# Altium PCB AX301_AX4010.PcbDoc (part 5 of 10)
Units mm, origin at the board's own origin, x right, y up, seen from the top; angles counter-clockwise.
Board outline 131.7 x 91.8 mm, 4 copper layers (Top Layer, GND, Mid-Layer 1, Bottom Layer); 191 components, 338 nets, 1108 pads, 420 vias.
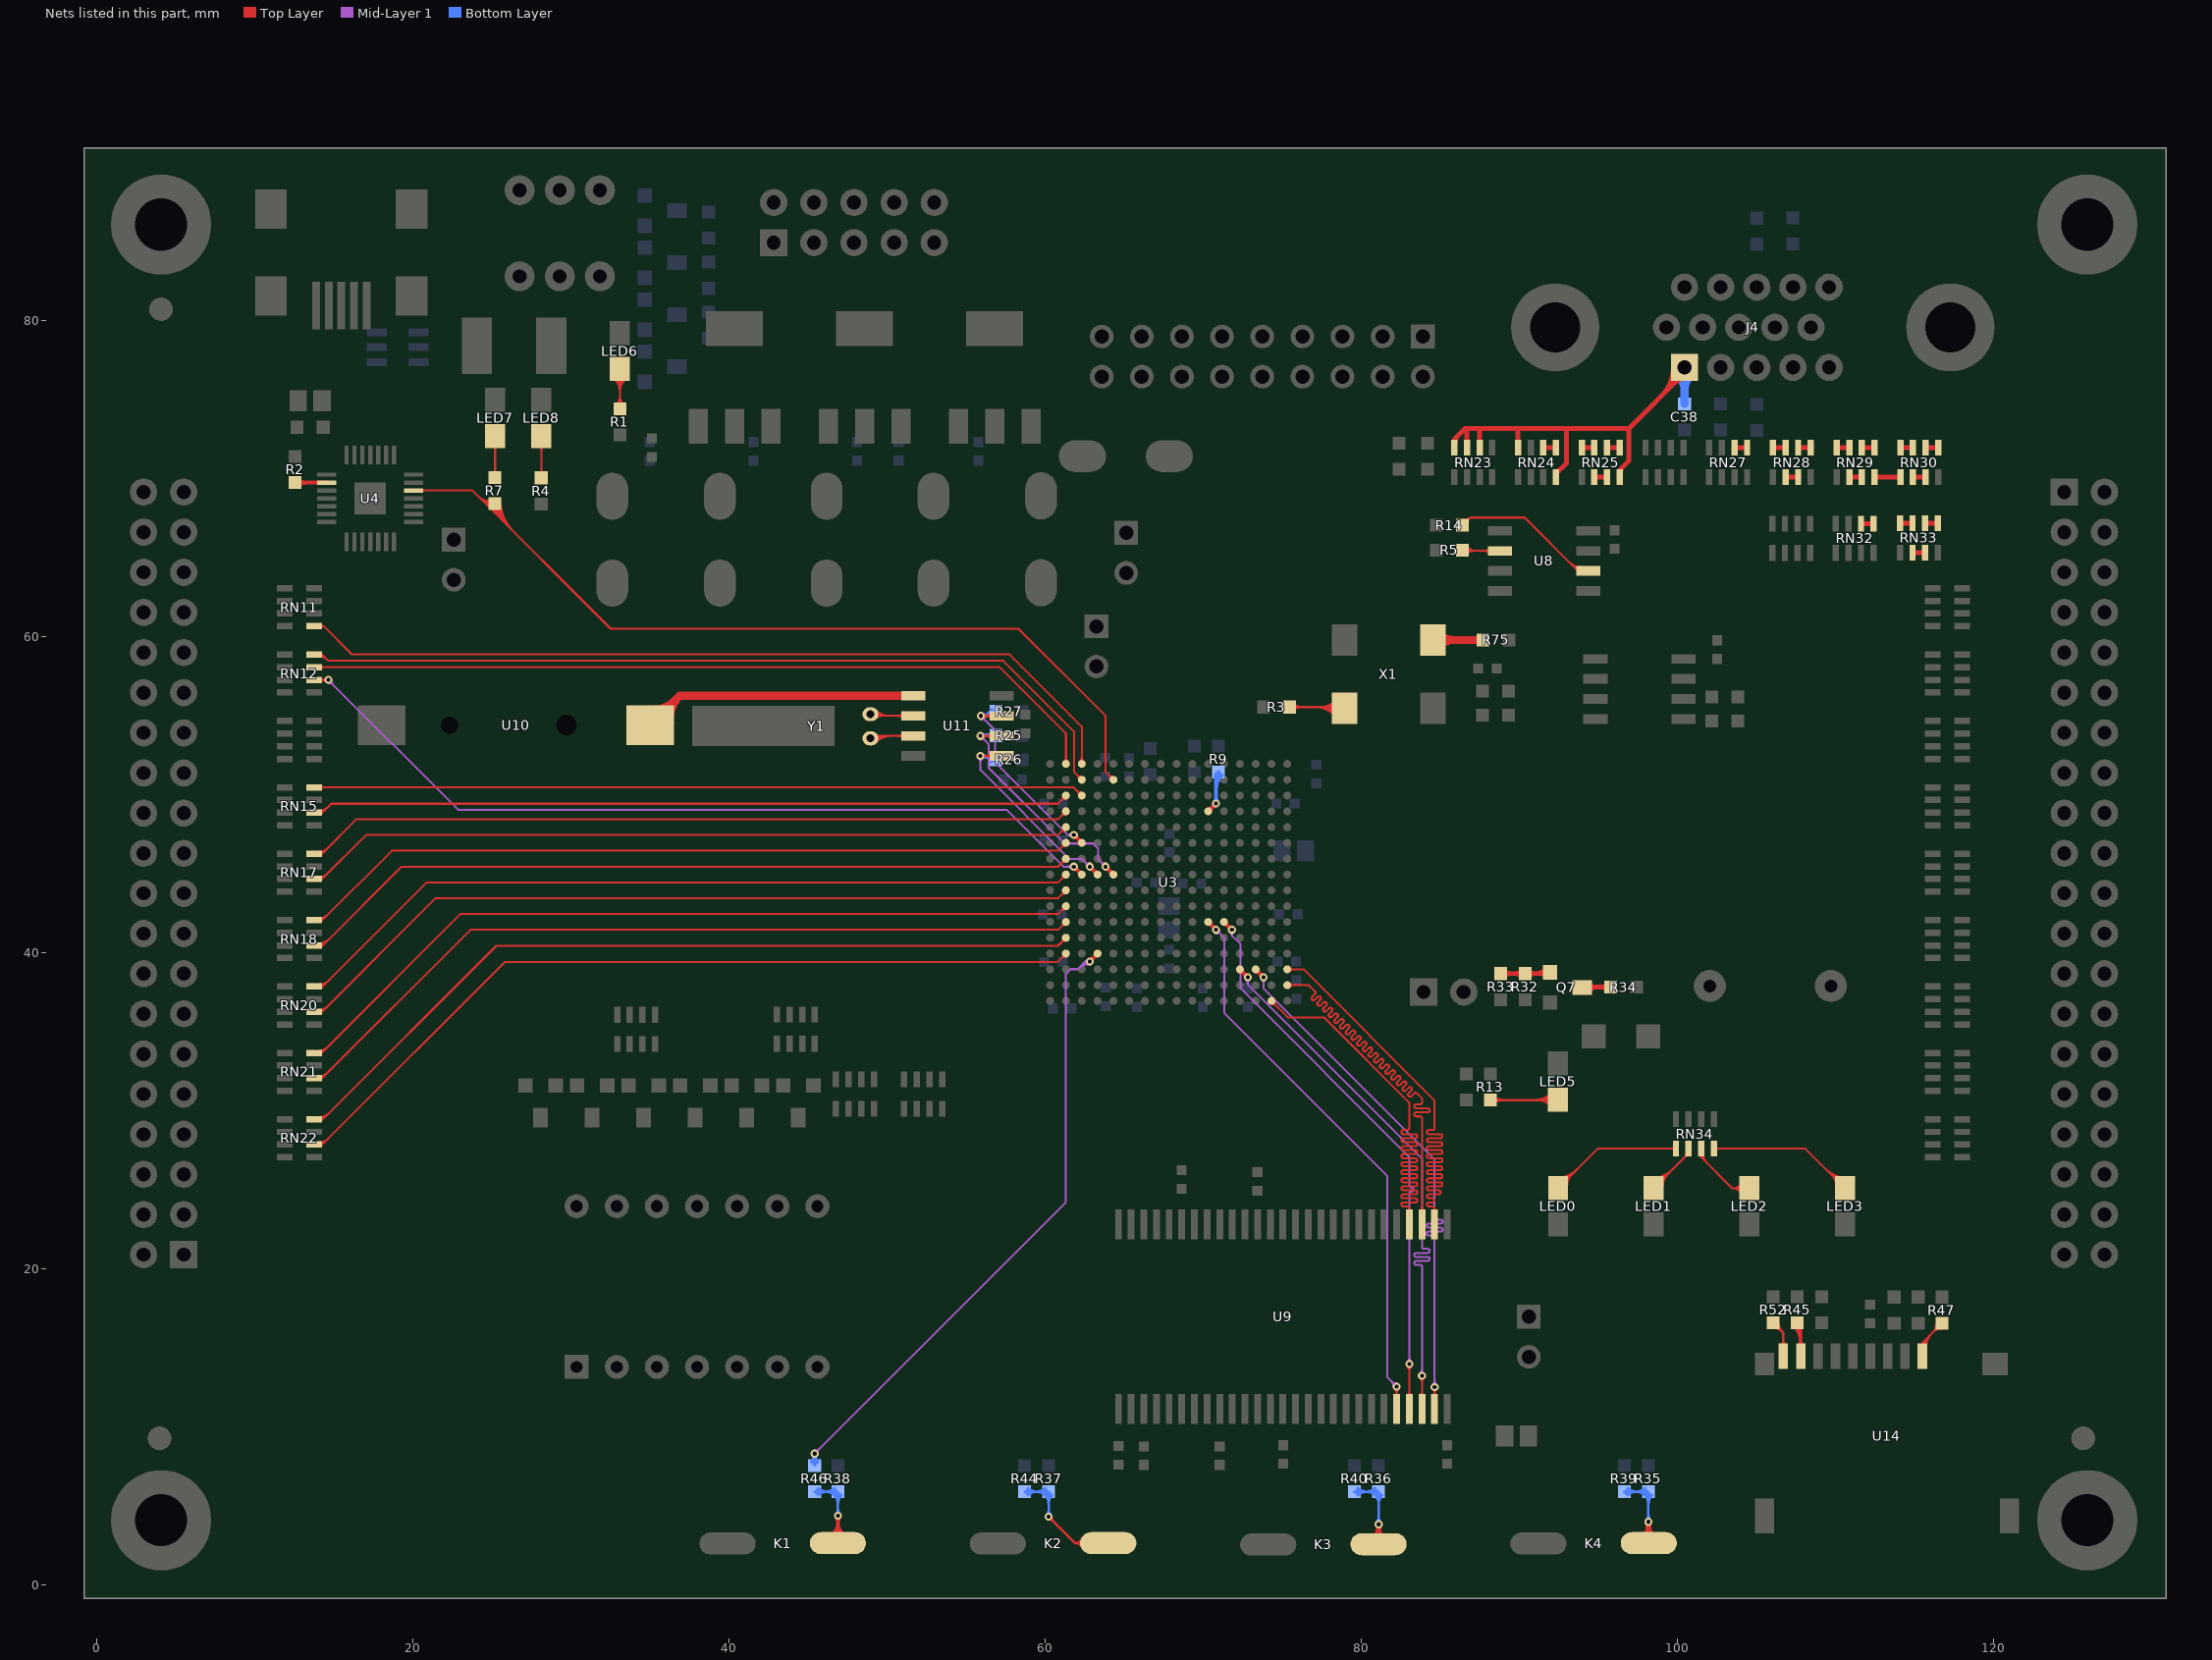
[diagram p7: the nets of this part, all layers, seen from the top]

## Via types
v1: diameter 0.508, hole 0.254, Top Layer to Bottom Layer, 377 vias
v2: diameter 0.762, hole 0.381, Top Layer to Bottom Layer, 41 vias
v3: diameter 1.016, hole 0.508, Top Layer to Bottom Layer, 2 vias

## Nets (pads, with @x,y where several pads share a name; then routed paths per layer and width w, separated by ;. In a path a pad name is that pad's centre, name@x,y a point inside that pad or via, vN(x,y) a via of type N, cw(c..) or ccw(c..) an arc to the next point about the centre after c; other vN are vias at no path point) (continued)
NetK1_1: K1.1 R38.2 R46.2 | length 18.6
  Top Layer w0.152: K1.1@46.447,3.057 ccw(c45.382,4.122) 46.888,4.122 ccw(c48.394,4.122) K1.1@47.329,3.057 ; K1.1@46.555,2.95 ccw(c45.75,3.754) 46.888,3.754 ccw(c48.026,3.754) K1.1@47.222,2.95 ; K1.1@46.663,2.842 ccw(c46.118,3.386) 46.888,3.386 ccw(c47.659,3.386) K1.1@47.114,2.842 ; v1@46.744,4.24 cw(c46.295,3.918) 46.84,3.828 ; v1@46.763,4.218 cw(c46.459,3.914) 46.888,3.914 cw(c47.318,3.914) v1@47.014,4.218 ; v1@46.785,4.199 cw(c46.606,3.95) 46.909,4 ; 46.868,4 cw(c47.171,3.95) v1@46.992,4.199 ; K1.1@46.888,2.616 v1(46.888,4.343) ; 46.937,3.828 cw(c47.482,3.918) v1@47.033,4.24
  Bottom Layer w0.152: R46.2@45.415,5.867 R38.2@46.888,5.867 v1(46.888,4.343) ; R46.2@45.541,5.742 cw(c45.844,5.438) 45.844,5.867 cw(c45.844,6.297) R46.2@45.541,5.993 ; R46.2@45.649,5.634 cw(c46.212,5.07) 46.212,5.867 cw(c46.212,6.665) R46.2@45.649,6.101 ; R38.2@46.655,6.101 cw(c46.091,6.665) 46.091,5.867 cw(c46.091,5.07) 46.655,5.634 cw(c46.091,5.07) 46.888,5.07 cw(c47.686,5.07) R38.2@47.122,5.634 ; v1@46.763,4.469 ccw(c46.459,4.773) 46.888,4.773 ccw(c47.318,4.773) v1@47.014,4.469 ; R38.2@46.763,5.993 cw(c46.459,6.297) 46.459,5.867 cw(c46.459,5.438) 46.763,5.742 cw(c46.459,5.438) 46.888,5.438 cw(c47.318,5.438) R38.2@47.014,5.742
NetK2_1: K2.1 R37.2 R44.2 | length 16.7
  Top Layer w0.152: v1@60.223,4.115 cw(c60.223,3.686) 60.527,3.989 cw(c60.83,4.293) v1@60.401,4.293 ; v1(60.223,4.293) 61.9,2.616 ; K2.1@62.356,2.335 ccw(c61.9,2.105) 61.9,2.616 ; K2.1@62.356,2.897 cw(c61.9,3.127) 61.9,2.616 ; K2.1@62.492,2.404 ccw(c62.147,2.23) 62.147,2.616 ccw(c62.147,3.002) K2.1@62.492,2.828 ; K2.1@63.991,2.616 61.9,2.616
  Bottom Layer w0.152: R44.2@58.699,5.867 R37.2@60.223,5.867 v1(60.223,4.293) ; R44.2@58.825,5.742 cw(c59.129,5.438) 59.129,5.867 cw(c59.129,6.297) R44.2@58.825,5.993 ; R44.2@58.933,5.634 cw(c59.497,5.07) 59.497,5.867 cw(c59.497,6.665) R44.2@58.933,6.101 ; R37.2@59.99,6.101 cw(c59.426,6.665) 59.426,5.867 cw(c59.426,5.07) 59.99,5.634 cw(c59.426,5.07) 60.223,5.07 cw(c61.021,5.07) R37.2@60.457,5.634 ; v1@60.098,4.418 ccw(c59.794,4.722) 60.223,4.722 ccw(c60.653,4.722) v1@60.349,4.418 ; R37.2@60.098,5.993 cw(c59.794,6.297) 59.794,5.867 cw(c59.794,5.438) 60.098,5.742 cw(c59.794,5.438) 60.223,5.438 cw(c60.653,5.438) R37.2@60.349,5.742
NetK3_2: K3.2 R36.2 R40.2 | length 16.5
  Top Layer w0.152: K3.2@80.719,3.044 ccw(c80.145,3.81) v1(81.102,3.81) ; K3.2@80.811,2.922 ccw(c80.374,3.505) 81.102,3.505 ; v1@80.948,3.721 cw(c80.576,3.506) 80.991,3.395 cw(c81.406,3.284) v1@81.191,3.656 ; v1@80.976,3.684 cw(c80.673,3.381) 81.102,3.381 cw(c81.531,3.381) v1@81.228,3.684 ; v1@81.013,3.656 cw(c80.799,3.284) 81.213,3.395 cw(c81.628,3.506) v1@81.256,3.721 ; K3.2@81.102,2.554 v1(81.102,3.81) ; 81.102,3.497 ccw(c81.84,3.497) K3.2@81.385,2.916 ; K3.2@81.479,3.036 cw(c82.086,3.81) v1(81.102,3.81)
  Bottom Layer w0.152: R40.2@79.561,5.85 R40.2@79.578,5.867 R36.2@81.102,5.867 v1(81.102,3.81) ; R40.2@79.704,5.742 cw(c80.007,5.438) 80.007,5.867 cw(c80.007,6.297) R40.2@79.704,5.993 ; R40.2@79.812,5.634 cw(c80.375,5.07) 80.375,5.867 cw(c80.375,6.665) R40.2@79.812,6.101 ; R36.2@80.869,6.101 cw(c80.305,6.665) 80.305,5.867 cw(c80.305,5.07) 80.869,5.634 cw(c80.305,5.07) 81.102,5.07 cw(c81.899,5.07) R36.2@81.336,5.634 ; v1@80.976,3.936 ccw(c80.673,4.239) 81.102,4.239 ccw(c81.531,4.239) v1@81.228,3.936 ; R36.2@80.976,5.993 cw(c80.673,6.297) 80.673,5.867 cw(c80.673,5.438) 80.976,5.742 cw(c80.673,5.438) 81.102,5.438 cw(c81.531,5.438) R36.2@81.228,5.742
NetK4_1: K4.1 R35.2 R39.2 | length 17.2
  Top Layer w0.152: K4.1@97.778,3.079 ccw(c96.982,3.962) v1(98.171,3.962) ; K4.1@97.881,2.966 ccw(c97.291,3.619) 98.171,3.619 ; v1@98.017,3.874 cw(c97.645,3.659) 98.06,3.548 ; v1@98.045,3.837 cw(c97.742,3.533) 98.171,3.533 cw(c98.6,3.533) v1@98.297,3.837 ; 98.06,3.548 cw(c98.474,3.437) v1@98.26,3.808 ; v1@98.082,3.808 cw(c97.868,3.437) 98.282,3.548 cw(c98.697,3.659) v1@98.325,3.874 ; K4.1@98.171,2.642 v1(98.171,3.962) ; 98.171,3.33 ccw(c98.765,3.33) K4.1@98.395,2.866 ; 98.171,3.646 ccw(c99.016,3.646) K4.1@98.49,2.985 ; K4.1@98.585,3.104 cw(c99.267,3.962) v1(98.171,3.962)
  Bottom Layer w0.152: R39.2@96.647,5.867 R35.2@98.171,5.867 v1(98.171,3.962) ; R39.2@96.773,5.742 cw(c97.076,5.438) 97.076,5.867 cw(c97.076,6.297) R39.2@96.773,5.993 ; R39.2@96.88,5.634 cw(c97.444,5.07) 97.444,5.867 cw(c97.444,6.665) R39.2@96.88,6.101 ; R35.2@97.938,6.101 cw(c97.374,6.665) 97.374,5.867 cw(c97.374,5.07) 97.938,5.634 cw(c97.374,5.07) 98.171,5.07 cw(c98.968,5.07) R35.2@98.404,5.634 ; v1@98.045,4.088 ccw(c97.742,4.392) 98.171,4.392 ccw(c98.6,4.392) v1@98.297,4.088 ; R35.2@98.045,5.993 cw(c97.742,6.297) 97.742,5.867 cw(c97.742,5.438) 98.045,5.742 cw(c97.742,5.438) 98.171,5.438 cw(c98.6,5.438) R35.2@98.297,5.742
NetLED0_1: LED0.1 RN34.5 | length 14.7
  Top Layer w0.127: LED0.1@92.456,25.07 94.967,27.581 RN34.5@99.911,27.581 RN34.5@99.911,27.191 ; LED0.1@92.456,25.387 ccw(c92.456,26.154) LED0.1@92.998,25.612 ; LED0.1@92.456,25.514 ccw(c92.456,26.587) 93.215,25.829 ; LED0.1@92.456,25.641 ccw(c92.456,27.021) 93.432,26.045 ; LED0.1@92.456,25.768 ccw(c92.456,27.455) 93.648,26.262 ; LED0.1@92.9,25.197 cw(c93.667,25.197) 93.125,25.739 ; LED0.1@93.027,25.197 cw(c94.101,25.197) 93.342,25.956 ; RN34.5@99.815,27.484 ccw(c99.582,27.251) 99.582,27.581 ccw(c99.582,27.91) RN34.5@99.815,27.677
NetLED1_1: LED1.1 RN34.6 | length 9.2
  Top Layer w0.127: LED1.1@98.51,25.07 100.711,27.271 RN34.6@100.711,27.581 ; LED1.1@98.51,25.387 ccw(c98.51,26.154) LED1.1@99.052,25.612 ; LED1.1@98.51,25.514 ccw(c98.51,26.587) 99.268,25.829 ; LED1.1@98.51,25.641 ccw(c98.51,27.021) 99.485,26.045 ; LED1.1@98.51,25.768 ccw(c98.51,27.455) 99.702,26.262 ; LED1.1@98.954,25.197 cw(c99.721,25.197) 99.179,25.739 ; LED1.1@99.081,25.197 cw(c100.154,25.197) 99.395,25.956 ; 100.472,27.032 ccw(c100.223,27.281) RN34.6@100.575,27.281 ; 100.494,27.054 cw(c100.711,26.837) RN34.6@100.711,27.144
NetLED2_1: LED2.1 RN34.7 | length 9
  Top Layer w0.127: RN34.7@101.394,27.281 ccw(c101.695,27.281) 101.482,27.067 ; RN34.7@101.44,27.164 cw(c101.364,27.038) 101.511,27.038 ; RN34.7@101.511,27.581 101.511,27.038 ; RN34.7@101.521,27.281 ccw(c102.129,27.281) 101.699,26.851 ; RN34.7@101.582,27.164 ccw(c101.658,27.038) 101.511,27.038 ; RN34.7@101.648,27.281 ccw(c102.562,27.281) 101.916,26.634 ; LED2.1@104.092,24.747 ccw(c103.48,24.328) 103.48,25.07 ; LED2.1@104.092,25.393 cw(c103.48,25.812) 103.48,25.07 ; LED2.1@104.197,24.819 ccw(c103.72,24.493) 103.72,25.07 ccw(c103.72,25.647) LED2.1@104.197,25.321 ; LED2.1@104.885,25.07 LED2.1@104.563,25.07 103.48,25.07 ; 101.511,27.038 103.48,25.07
NetLED3_1: LED3.1 RN34.8 | length 15.4
  Top Layer w0.127: RN34.8@102.311,27.33 RN34.8@102.311,27.581 108.106,27.581 LED3.1@110.617,25.07 ; RN34.8@102.408,27.484 cw(c102.641,27.251) 102.641,27.581 cw(c102.641,27.91) RN34.8@102.408,27.677 ; 109.425,26.262 ccw(c110.617,27.455) LED3.1@110.617,25.768 ; 109.641,26.045 ccw(c110.617,27.021) LED3.1@110.617,25.641 ; 109.731,25.956 cw(c108.972,25.197) LED3.1@110.045,25.197 ; 109.858,25.829 ccw(c110.617,26.587) LED3.1@110.617,25.514 ; 109.948,25.739 cw(c109.406,25.197) LED3.1@110.172,25.197 ; LED3.1@110.075,25.612 ccw(c110.617,26.154) LED3.1@110.617,25.387
NetLED5_2: LED5.2 R13.2 | length 10.4
  Top Layer w0.152: R13.2@88.163,30.658 LED5.2@92.405,30.658 ; R13.2@88.289,30.532 cw(c88.593,30.229) 88.593,30.658 cw(c88.593,31.087) R13.2@88.289,30.784 ; R13.2@88.397,30.424 cw(c88.961,29.861) 88.961,30.658 cw(c88.961,31.455) R13.2@88.397,30.891 ; 91.02,30.658 ccw(c91.02,32.094) LED5.2@92.035,31.078 ; 91.143,30.658 cw(c91.143,29.395) LED5.2@92.035,30.288 ; 91.388,30.658 ccw(c91.388,31.726) LED5.2@92.143,30.971 ; 91.511,30.658 cw(c91.511,29.763) LED5.2@92.143,30.396 ; 91.756,30.658 ccw(c91.756,31.358) LED5.2@92.251,30.863
NetLED6_1: LED6.1 R1.2 | length 9.7
  Top Layer w0.127: LED6.1@32.692,76.38 cw(c31.716,75.404) 33.096,75.404 cw(c34.476,75.404) LED6.1@33.5,76.38 ; LED6.1@32.782,76.47 cw(c32.023,75.711) 33.096,75.711 cw(c34.169,75.711) LED6.1@33.411,76.47 ; R1.2@32.854,74.639 ccw(c32.268,75.224) 33.096,75.224 ccw(c33.924,75.224) R1.2@33.339,74.639 ; LED6.1@32.872,76.56 cw(c32.33,76.018) 33.096,76.018 cw(c33.863,76.018) LED6.1@33.321,76.56 ; R1.2@32.944,74.549 ccw(c32.575,74.918) 33.096,74.918 ccw(c33.617,74.918) R1.2@33.249,74.549 ; R1.2@33.096,74.397 LED6.1@33.096,76.911
NetLED7_2: LED7.2 R7.2 | length 8.3
  Top Layer w0.127: LED7.2@24.793,72.722 cw(c23.817,71.747) 25.197,71.747 cw(c26.577,71.747) LED7.2@25.601,72.722 ; LED7.2@24.882,72.812 cw(c24.124,72.053) 25.197,72.053 cw(c26.27,72.053) LED7.2@25.511,72.812 ; LED7.2@24.972,72.902 cw(c24.43,72.36) 25.197,72.36 cw(c25.963,72.36) LED7.2@25.421,72.902 ; R7.2@25.197,70.053 LED7.2@25.197,73.254
NetLED8_2: LED8.2 R4.2 | length 8.2
  Top Layer w0.127: LED8.2@27.714,72.646 cw(c26.738,71.671) 28.118,71.671 cw(c29.498,71.671) LED8.2@28.522,72.646 ; LED8.2@27.803,72.736 cw(c27.045,71.977) 28.118,71.977 cw(c29.191,71.977) LED8.2@28.432,72.736 ; LED8.2@27.893,72.826 cw(c27.351,72.284) 28.118,72.284 cw(c28.884,72.284) LED8.2@28.342,72.826 ; R4.2@28.118,70.028 LED8.2@28.118,73.177
NetQ7_1: Q7.1 R32.2 R33.2 | length 7.1
  Top Layer w0.305: R33.2@88.824,38.659 R32.2@90.373,38.659 Q7.1@91.872,38.659 ; R33.2@89.003,38.479 cw(c89.437,38.046) 89.437,38.659 cw(c89.437,39.272) R33.2@89.003,38.838 ; R32.2@90.194,38.479 ccw(c89.76,38.046) 89.76,38.659 ccw(c89.76,39.272) R32.2@90.194,38.838 ; R32.2@90.553,38.479 cw(c90.986,38.046) 90.986,38.659 cw(c90.986,39.272) R32.2@90.553,38.838 ; 91.028,38.659 ccw(c91.028,39.655) Q7.1@91.732,38.951 ; 91.396,38.659 cw(c91.396,38.183) Q7.1@91.732,38.519
NetQ7_3: Q7.3 R34.1 | length 3.9
  Top Layer w0.305: Q7.3@94.005,37.795 R34.1@95.783,37.795 ; Q7.3@94.373,37.554 cw(c94.955,36.973) 94.955,37.795 ; Q7.3@94.373,37.985 ccw(c94.832,38.444) 94.832,37.795 ; R34.1@95.604,37.616 ccw(c95.17,37.182) 95.17,37.795 ccw(c95.17,38.408) R34.1@95.604,37.975
NetR2_1: R2.1 U4.9 | length 3.1
  Top Layer w0.254: R2.1@12.55,69.726 U4.9@14.546,69.726 ; R2.1@12.745,69.525 cw(c13.228,69.042) 13.228,69.726 ; R2.1@12.745,69.921 ccw(c13.216,70.391) 13.216,69.726
NetR3_2: R3.2 X1.3 | length 13.3
  Top Layer w0.127: R3.2@75.463,55.524 X1.3@78.74,55.524 ; R3.2@75.616,55.372 cw(c75.985,55.003) 75.985,55.524 cw(c75.985,56.046) R3.2@75.616,55.677 ; R3.2@75.706,55.282 cw(c76.291,54.697) 76.291,55.524 cw(c76.291,56.352) R3.2@75.706,55.767 ; 76.981,55.524 cw(c76.981,53.486) X1.3@78.422,54.927 ; 77.288,55.524 cw(c77.288,53.793) X1.3@78.512,55.017 ; 77.349,55.524 ccw(c77.349,57.042) X1.3@78.422,55.969 ; 77.594,55.524 cw(c77.594,54.099) X1.3@78.602,55.107 ; 77.656,55.524 ccw(c77.656,56.736) X1.3@78.512,55.879 ; 77.901,55.524 cw(c77.901,54.406) X1.3@78.692,55.197 ; 77.962,55.524 ccw(c77.962,56.429) X1.3@78.602,55.789 ; X1.3@78.816,55.448 X1.3@78.943,55.448
NetR5_2: R5.2 U8.2 | length 5.1
  Top Layer w0.127: R5.2@86.462,65.405 U8.2@88.773,65.405 ; R5.2@86.563,65.608 ccw(c87.055,66.1) 87.055,65.405 ; R5.2@86.653,65.213 cw(c87.116,64.751) 87.116,65.405 ; R5.2@86.653,65.698 ccw(c87.361,66.406) 87.361,65.405 ; U8.2@88.145,65.234 ccw(c87.733,64.822) 87.733,65.405 ccw(c87.733,65.988) U8.2@88.145,65.576
NetR14_2: R14.2 U8.6 | length 12.6
  Top Layer w0.127: R14.2@86.411,67.031 86.893,67.513 ; R14.2@86.442,67.244 ccw(c86.489,67.56) 86.715,67.334 ccw(c86.941,67.108) R14.2@86.624,67.062 ; R14.2@86.461,67.37 ccw(c86.534,67.872) 86.893,67.513 ; R14.2@86.75,67.08 cw(c87.252,67.154) 86.893,67.513 ; 93.188,64.673 ccw(c93.904,65.388) U8.6@93.904,64.376 ; 93.405,64.456 ccw(c93.904,64.954) U8.6@93.904,64.249 ; U8.6@93.618,64.243 cw(c93.509,64.135) U8.6@93.662,64.135 ; U8.6@94.361,64.135 93.726,64.135 90.348,67.513 86.893,67.513
NetR45_2: R45.2 U14.8 | length 6.6
  Top Layer w0.152: R45.2@107.361,16.327 cw(c106.28,15.247) U14.8@107.809,15.247 ; R45.2@107.469,16.435 cw(c106.648,15.614) 107.809,15.614 ; R45.2@107.576,16.543 cw(c107.016,15.982) 107.809,15.982 ; R45.2@107.594,16.561 107.809,16.347 U14.8@107.809,14.448 ; U14.8@107.634,15.089 ccw(c107.166,15.467) 107.761,15.557 ; U14.8@107.65,15.106 ccw(c107.268,15.488) 107.809,15.488 ccw(c108.349,15.488) U14.8@107.967,15.106 ; 107.788,15.382 ccw(c108.171,15.44) U14.8@107.941,15.128
NetR47_2: R47.2 U14.1 | length 8.1
  Top Layer w0.127: U14.1@115.364,14.948 cw(c115.879,14.948) 115.515,15.312 ; U14.1@115.416,15.166 ccw(c115.357,15.306) 115.509,15.306 ; U14.1@115.491,14.948 cw(c116.312,14.948) 115.732,15.529 ; U14.1@115.509,14.448 115.509,15.306 ; U14.1@115.601,15.166 cw(c115.661,15.306) 115.509,15.306 ; U14.1@115.618,14.948 cw(c116.746,14.948) 115.948,15.745 ; U14.1@115.745,14.948 cw(c117.179,14.948) 116.165,15.962 ; R47.2@116.395,16.535 cw(c115.568,16.535) 116.153,15.95 cw(c116.738,15.365) R47.2@116.738,16.192 ; R47.2@116.522,16.535 cw(c116.001,16.535) 116.37,16.167 cw(c116.738,15.798) R47.2@116.738,16.319 ; R47.2@116.738,16.535 115.509,15.306
NetR52_2: R52.2 U14.9 | length 5.2
  Top Layer w0.152: R52.2@106.07,16.231 cw(c106.07,15.433) 106.634,15.997 cw(c107.198,16.561) R52.2@106.401,16.561 ; R52.2@106.07,16.383 cw(c106.07,15.954) 106.374,16.257 cw(c106.677,16.561) R52.2@106.248,16.561 ; R52.2@106.07,16.561 106.709,15.923 U14.9@106.709,14.448 ; U14.9@106.55,15.106 ccw(c106.168,15.488) 106.709,15.488 ccw(c107.249,15.488) U14.9@106.867,15.106
NetR75_1: R75.1 X1.1 | length 4.9
  Top Layer w0.508: X1.1@84.531,59.766 R75.1@87.325,59.766 ; X1.1@84.917,59.38 cw(c85.849,58.448) 85.849,59.766 cw(c85.849,61.084) X1.1@84.917,60.152
NetRN24_1: RN24.1 RN24.2 | length 0.8
  Top Layer w0.305: RN24.2@91.522,71.933 RN24.1@92.322,71.933
NetRN25_1: RN25.1 RN25.2 | length 0.8
  Top Layer w0.305: RN25.2@95.553,71.933 RN25.1@96.353,71.933
NetRN25_3: RN25.3 RN25.4 | length 0.8
  Top Layer w0.305: RN25.4@93.953,71.933 RN25.3@94.753,71.933
NetRN25_6: RN25.6 RN25.7 | length 0.8
  Top Layer w0.305: RN25.6@94.753,70.075 RN25.7@95.553,70.075
NetRN27_1: RN27.1 RN27.2 | length 0.8
  Top Layer w0.305: RN27.2@103.616,71.933 RN27.1@104.416,71.933
NetRN28_1: RN28.1 RN28.2 | length 0.8
  Top Layer w0.305: RN28.2@107.683,71.933 RN28.1@108.483,71.933
NetRN28_3: RN28.3 RN28.4 | length 0.8
  Top Layer w0.305: RN28.4@106.083,71.933 RN28.3@106.883,71.933
NetRN28_6: RN28.6 RN28.7 | length 0.8
  Top Layer w0.305: RN28.6@106.883,70.075 RN28.7@107.683,70.075
NetRN29_1: RN29.1 RN29.2 | length 0.8
  Top Layer w0.305: RN29.2@111.671,71.933 RN29.1@112.471,71.933
NetRN29_3: RN29.3 RN29.4 | length 0.8
  Top Layer w0.305: RN29.4@110.071,71.933 RN29.3@110.871,71.933
NetRN29_6: RN29.6 RN29.7 | length 0.8
  Top Layer w0.305: RN29.6@110.871,70.075 RN29.7@111.671,70.075
NetRN29_8: RN29.8 RN30.5 | length 1.6
  Top Layer w0.305: RN29.8@112.471,70.075 RN30.5@114.11,70.075
NetRN30_1: RN30.1 RN30.2 | length 0.8
  Top Layer w0.305: RN30.2@115.71,71.933 RN30.1@116.51,71.933
NetRN30_3: RN30.3 RN30.4 | length 0.8
  Top Layer w0.305: RN30.4@114.11,71.933 RN30.3@114.91,71.933
NetRN30_6: RN30.6 RN30.7 | length 0.8
  Top Layer w0.305: RN30.6@114.91,70.075 RN30.7@115.71,70.075
NetRN32_1: RN32.1 RN32.2 | length 0.8
  Top Layer w0.305: RN32.2@111.62,67.132 RN32.1@112.42,67.132
NetRN33_1: RN33.1 RN33.2 | length 0.8
  Top Layer w0.305: RN33.2@115.684,67.158 RN33.1@116.484,67.158
NetRN33_3: RN33.3 RN33.4 | length 0.8
  Top Layer w0.305: RN33.4@114.084,67.158 RN33.3@114.884,67.158
NetRN33_6: RN33.6 RN33.7 | length 0.8
  Top Layer w0.305: RN33.6@114.884,65.3 RN33.7@115.684,65.3
NetU10_1: U10.1 U11.1 | length 21.9
  Top Layer w0.508: U10.1@35.017,54.381 36.871,56.236 ; U10.1@35.267,55.377 ccw(c35.267,57.178) 36.541,55.905 ; U10.1@35.752,54.434 cw(c37.034,54.575) U10.1@36.122,55.487 ; U10.1@36.257,54.49 cw(c38.384,54.722) 36.871,56.236 ; U11.1@51.664,56.236 36.871,56.236
NetU11_2: U11.2 Y1.1 | length 6.2
  Top Layer w0.127: Y1.1@49.047,54.966 U11.2@51.664,54.966 ; Y1.1@49.099,55.157 ccw(c49.561,55.619) 49.561,54.966 ; Y1.1@49.189,55.247 ccw(c49.868,55.926) 49.868,54.966 ; Y1.1@49.279,54.798 cw(c49.684,54.393) 49.684,54.966 ; Y1.1@49.279,55.337 ccw(c50.174,56.232) 50.174,54.966 ; U11.2@51.036,54.795 ccw(c50.624,54.383) 50.624,54.966 ccw(c50.624,55.548) U11.2@51.036,55.136
NetU11_3: U11.3 Y1.2 | length 6.5
  Top Layer w0.127: Y1.2@49.098,53.696 U11.3@51.664,53.696 ; Y1.2@49.099,53.453 cw(c49.684,52.869) 49.684,53.696 ; Y1.2@49.189,53.364 cw(c49.99,52.562) 49.99,53.696 ; Y1.2@49.279,53.274 cw(c50.297,52.255) 50.297,53.696 ; Y1.2@49.279,53.813 ccw(c49.561,54.095) 49.561,53.696 ; U11.3@51.036,53.525 ccw(c50.624,53.113) 50.624,53.696 ccw(c50.624,54.278) U11.3@51.036,53.866
NSTATUS: R9.2 U3.F4 | length 5.6
  Top Layer w0.254: U3.F4@70.318,48.925 v1(70.818,49.425) ; U3.F4@70.318,49.048 ccw(c70.318,49.345) 70.528,49.135 ccw(c70.738,48.925) U3.F4@70.441,48.925 ; v1@70.691,49.425 cw(c70.384,49.425) 70.601,49.208 cw(c70.818,48.991) v1@70.818,49.298
  Bottom Layer w0.254: v1@70.728,49.514 ccw(c70.511,49.731) 70.818,49.731 ccw(c71.125,49.731) v1@70.908,49.514 ; v1(70.818,49.425) 70.818,51.26 R9.2@70.968,51.41 ; 70.818,50.374 cw(c72.003,50.374) R9.2@71.165,51.212 ; 70.818,50.987 cw(c71.39,50.987) R9.2@70.986,51.392
P1: RN11.5 U3.P1 | length 54.7
  Top Layer w0.127: RN11.5@13.745,60.643 14.351,60.643 ; RN11.5@14.147,60.552 cw(c14.351,60.369) 14.351,60.643 ; RN11.5@14.147,60.734 ccw(c14.351,60.917) 14.351,60.643 ; U3.P1@62.186,52.056 ccw(c61.868,52.375) 62.318,52.375 ccw(c62.768,52.375) U3.P1@62.45,52.056 ; U3.P1@62.318,51.925 62.318,54.293 57.76,58.852 16.142,58.852 14.351,60.643
P2: RN12.8 U3.P2 | length 55.3
  Top Layer w0.127: RN12.8@13.745,58.842 14.249,58.842 ; RN12.8@14.045,58.706 cw(c14.045,57.883) 14.627,58.465 ; RN12.8@14.045,58.833 cw(c14.045,58.317) 14.41,58.682 ; RN12.8@14.171,58.79 cw(c14.249,58.758) 14.249,58.842 ; RN12.8@14.171,58.894 ccw(c14.249,58.927) 14.249,58.842 ; U3.P2@62.132,50.925 ccw(c61.681,50.925) 62,51.243 ccw(c62.318,51.561) U3.P2@62.318,51.111 ; U3.P2@62.318,50.925 61.824,51.419 61.824,53.975 57.353,58.445 14.646,58.445 14.249,58.842
P3: RN15.8 U3.P3 | length 50
  Top Layer w0.127: RN15.8@13.745,50.441 61.801,50.441 U3.P3@62.318,49.925 ; RN15.8@14.142,50.345 cw(c14.375,50.112) 14.375,50.441 cw(c14.375,50.771) RN15.8@14.142,50.538 ; U3.P3@62.132,49.925 ccw(c61.681,49.925) 62,50.243 ccw(c62.318,50.561) U3.P3@62.318,50.111
P8: RN12.6 U3.P8 | length 57.3
  Top Layer w0.127: RN12.6@13.745,57.242 v1(14.646,57.242) ; RN12.6@14.142,57.146 cw(c14.375,56.913) 14.375,57.242 cw(c14.375,57.572) RN12.6@14.142,57.339 ; v1@14.512,57.108 ccw(c14.187,56.782) 14.187,57.242 ccw(c14.187,57.702) v1@14.512,57.377
  Top Layer w0.254: v1@61.818,45.298 cw(c61.818,44.991) 62.035,45.208 cw(c62.252,45.425) v1@61.945,45.425 ; v1(61.818,45.425) U3.P8@62.318,44.925 ; U3.P8@62.195,44.925 ccw(c61.898,44.925) 62.108,45.135 ccw(c62.318,45.345) U3.P8@62.318,45.048
  Mid-Layer 1 w0.127: v1@14.646,57.052 cw(c14.646,56.592) 14.972,56.917 cw(c15.297,57.242) v1@14.837,57.242 ; v1(14.646,57.242) 22.867,49.022 57.556,49.022 61.154,45.425 v1(61.818,45.425) ; v1@61.683,45.29 ccw(c61.358,44.965) 61.358,45.425 ccw(c61.358,45.885) v1@61.683,45.559
R1: RN12.7 U3.R1 | length 52.5
  Top Layer w0.127: RN12.7@13.745,58.042 57.121,58.042 61.318,53.846 U3.R1@61.318,51.925 ; RN12.7@14.142,57.946 cw(c14.375,57.713) 14.375,58.042 cw(c14.375,58.372) RN12.7@14.142,58.139 ; U3.R1@61.186,52.056 ccw(c60.868,52.375) 61.318,52.375 ccw(c61.768,52.375) U3.R1@61.45,52.056
R3: RN15.6 U3.R3 | length 50.1
  Top Layer w0.127: RN15.6@13.745,48.841 14.275,48.841 ; RN15.6@14.045,48.851 ccw(c14.045,49.428) 14.453,49.02 ; RN15.6@14.045,48.978 ccw(c14.045,49.862) 14.67,49.237 ; RN15.6@14.165,48.776 cw(c14.275,48.716) 14.275,48.841 ; RN15.6@14.165,48.906 ccw(c14.275,48.966) 14.275,48.841 ; U3.R3@61.132,49.925 cw(c60.681,49.925) 61,49.606 cw(c61.318,49.288) U3.R3@61.318,49.738 ; U3.R3@61.318,49.925 60.796,49.403 14.837,49.403 14.275,48.841
R4: RN17.8 U3.R4 | length 50.6
  Top Layer w0.127: RN17.8@13.745,46.241 14.249,46.241 ; RN17.8@14.045,46.25 ccw(c14.045,46.766) 14.41,46.401 ; RN17.8@14.045,46.377 ccw(c14.045,47.2) 14.627,46.618 ; RN17.8@14.171,46.189 cw(c14.249,46.156) 14.249,46.241 ; RN17.8@14.171,46.293 ccw(c14.249,46.325) 14.249,46.241 ; U3.R4@61.132,48.925 cw(c60.681,48.925) 61,48.606 cw(c61.318,48.288) U3.R4@61.318,48.738 ; U3.R4@61.318,48.925 60.831,48.438 16.447,48.438 14.249,46.241
R5: RN17.6 U3.R5 | length 50.9
  Top Layer w0.127: RN17.6@13.745,44.641 14.249,44.641 ; RN17.6@14.045,44.65 ccw(c14.045,45.166) 14.41,44.801 ; RN17.6@14.045,44.777 ccw(c14.045,45.6) 14.627,45.018 ; RN17.6@14.171,44.589 cw(c14.249,44.556) 14.249,44.641 ; RN17.6@14.171,44.693 ccw(c14.249,44.725) 14.249,44.641 ; U3.R5@61.132,47.925 cw(c60.681,47.925) 61,47.606 cw(c61.318,47.288) U3.R5@61.318,47.738 ; U3.R5@61.318,47.925 60.815,47.422 17.03,47.422 14.249,44.641
R6: RN18.8 U3.R6 | length 51.7
  Top Layer w0.127: RN18.8@13.745,42.04 14.275,42.04 ; RN18.8@14.045,42.05 ccw(c14.045,42.627) 14.453,42.219 ; RN18.8@14.045,42.177 ccw(c14.045,43.06) 14.67,42.436 ; RN18.8@14.165,41.975 cw(c14.275,41.915) 14.275,42.04 ; RN18.8@14.165,42.105 ccw(c14.275,42.165) 14.275,42.04 ; U3.R6@61.132,46.925 cw(c60.681,46.925) 61,46.606 cw(c61.318,46.288) U3.R6@61.318,46.738 ; U3.R6@61.318,46.925 60.825,46.431 18.666,46.431 14.275,42.04
R7: RN18.6 U3.R7 | length 52.4
  Top Layer w0.127: RN18.6@13.745,40.44 14.3,40.44 ; RN18.6@14.045,40.323 ccw(c14.045,40.655) 14.28,40.42 ; RN18.6@14.045,40.45 ccw(c14.045,41.088) 14.497,40.637 ; RN18.6@14.045,40.577 ccw(c14.045,41.522) 14.714,40.854 ; RN18.6@14.159,40.364 cw(c14.3,40.27) 14.3,40.44 ; RN18.6@14.159,40.516 ccw(c14.3,40.61) 14.3,40.44 ; U3.R7@61.132,45.925 cw(c60.681,45.925) 61,45.606 cw(c61.318,45.288) U3.R7@61.318,45.738 ; U3.R7@61.318,45.925 60.809,45.415 19.275,45.415 14.3,40.44
R8: RN20.8 U3.R8 | length 53.1
  Top Layer w0.127: RN20.8@13.745,37.84 14.3,37.84 ; RN20.8@14.045,37.722 ccw(c14.045,38.054) 14.28,37.819 ; RN20.8@14.045,37.849 ccw(c14.045,38.488) 14.497,38.036 ; RN20.8@14.045,37.976 ccw(c14.045,38.921) 14.714,38.253 ; RN20.8@14.159,37.764 cw(c14.3,37.67) 14.3,37.84 ; RN20.8@14.159,37.915 ccw(c14.3,38.01) 14.3,37.84 ; U3.R8@61.132,44.925 cw(c60.681,44.925) 61,44.606 cw(c61.318,44.288) U3.R8@61.318,44.738 ; U3.R8@61.318,44.925 60.818,44.425 20.885,44.425 14.3,37.84
R9: RN20.6 U3.R9 | length 52.7
  Top Layer w0.127: RN20.6@13.745,36.24 14.249,36.24 ; RN20.6@14.045,36.249 ccw(c14.045,36.765) 14.41,36.4 ; RN20.6@14.045,36.376 ccw(c14.045,37.199) 14.627,36.617 ; RN20.6@14.171,36.187 cw(c14.249,36.155) 14.249,36.24 ; RN20.6@14.171,36.292 ccw(c14.249,36.324) 14.249,36.24 ; U3.R9@61.132,43.925 cw(c60.681,43.925) 61,43.606 cw(c61.318,43.288) U3.R9@61.318,43.738 ; U3.R9@61.318,43.925 60.827,43.434 21.444,43.434 14.249,36.24
R10: RN21.8 U3.R10 | length 53.1
  Top Layer w0.127: RN21.8@13.745,33.639 14.224,33.639 23.003,42.418 60.811,42.418 U3.R10@61.318,42.925 ; RN21.8@14.045,33.649 ccw(c14.045,34.103) 14.367,33.782 ; RN21.8@14.045,33.776 ccw(c14.045,34.537) 14.583,33.999 ; U3.R10@61.132,42.925 cw(c60.681,42.925) 61,42.606 cw(c61.318,42.288) U3.R10@61.318,42.738
R11: RN21.6 U3.R11 | length 53.6
  Top Layer w0.127: RN21.6@13.745,32.039 14.249,32.039 ; RN21.6@14.045,32.049 ccw(c14.045,32.565) 14.41,32.2 ; RN21.6@14.045,32.176 ccw(c14.045,32.998) 14.627,32.417 ; RN21.6@14.171,31.987 cw(c14.249,31.955) 14.249,32.039 ; RN21.6@14.171,32.091 ccw(c14.249,32.124) 14.249,32.039 ; U3.R11@61.132,41.925 cw(c60.681,41.925) 61,41.606 cw(c61.318,41.288) U3.R11@61.318,41.738 ; U3.R11@61.318,41.925 60.821,41.427 23.638,41.427 14.249,32.039
R12: RN22.8 U3.R12 | length 54.9
  Top Layer w0.127: RN22.8@13.745,29.439 14.3,29.439 ; RN22.8@14.045,29.321 ccw(c14.045,29.653) 14.28,29.418 ; RN22.8@14.045,29.448 ccw(c14.045,30.087) 14.497,29.635 ; RN22.8@14.045,29.575 ccw(c14.045,30.52) 14.714,29.852 ; RN22.8@14.159,29.363 cw(c14.3,29.269) 14.3,29.439 ; RN22.8@14.159,29.514 ccw(c14.3,29.609) 14.3,29.439 ; U3.R12@61.132,40.925 cw(c60.681,40.925) 61,40.606 cw(c61.318,40.288) U3.R12@61.318,40.738 ; U3.R12@61.318,40.925 60.805,40.411 25.273,40.411 14.3,29.439
R13: RN22.6 U3.R13 | length 54.7
  Top Layer w0.127: RN22.6@13.745,27.839 14.275,27.839 ; RN22.6@14.045,27.848 ccw(c14.045,28.425) 14.453,28.017 ; RN22.6@14.045,27.975 ccw(c14.045,28.859) 14.67,28.234 ; RN22.6@14.165,27.773 cw(c14.275,27.714) 14.275,27.839 ; RN22.6@14.165,27.904 ccw(c14.275,27.963) 14.275,27.839 ; U3.R13@61.132,39.925 cw(c60.681,39.925) 61,39.606 cw(c61.318,39.288) U3.R13@61.318,39.738 ; U3.R13@61.318,39.925 60.789,39.395 25.832,39.395 14.275,27.839
RED: C38.1 J4.1 RN23.2 RN23.3 RN23.4 RN24.4 RN24.8 RN25.8 | length 38.2
  Top Layer w0.305: RN23.4@85.89,71.933 85.89,72.479 86.563,73.152 92.989,73.152 ; RN23.4@85.938,72.233 cw(c86.648,72.233) 86.146,72.735 ; RN23.3@86.69,71.933 86.69,73.101 ; RN23.2@87.49,71.933 87.49,73.139 ; RN24.4@89.922,71.933 89.922,73.132 ; RN24.8@92.322,70.075 92.322,70.3 92.989,70.968 92.989,73.152 ; RN24.8@92.322,70.422 ccw(c92.322,70.718) 92.531,70.509 ; RN25.8@96.353,70.075 96.353,70.521 96.939,71.107 96.939,73.152 ; RN25.8@96.401,70.375 cw(c96.869,70.375) 96.538,70.706 ; 99,75.213 ccw(c97.201,77.013) J4.1@99.746,77.013 ; 99.521,75.734 ccw(c98.242,77.013) J4.1@100.051,77.013 ; 99.828,76.041 cw(c100.457,75.412) J4.1@100.457,76.302 ; J4.1@100.041,76.254 ccw(c99.282,77.013) J4.1@100.355,77.013 ; J4.1@100.457,77.013 100.457,76.67 96.939,73.152 ; 92.989,73.152 94.983,73.152 96.939,73.152
  Bottom Layer w0.508: J4.1@100.026,76.582 cw(c98.985,75.541) 100.457,75.541 cw(c101.929,75.541) J4.1@100.888,76.582 ; C38.1@100.457,74.701 J4.1@100.457,77.013
RESET: R46.1 U3.N13 | length 47.6
  Top Layer w0.254: v1(62.818,39.425) U3.N13@63.318,39.925 ; v1@62.818,39.552 ccw(c62.818,39.858) 63.035,39.641 ccw(c63.252,39.425) v1@62.945,39.425 ; U3.N13@63.195,39.925 cw(c62.898,39.925) 63.108,39.715 cw(c63.318,39.505) U3.N13@63.318,39.802
  Mid-Layer 1 w0.127: v1(45.415,8.28) 61.29,24.155 61.29,38.608 61.62,38.938 62.052,38.938 ; v1@45.415,8.471 ccw(c45.415,8.931) 45.74,8.606 ccw(c46.066,8.28) v1@45.606,8.28 ; 62.257,39.143 cw(c62.785,38.615) v1@62.815,39.361 ; 62.462,39.348 cw(c62.801,39.009) v1@62.821,39.488 ; v1@62.641,39.355 ccw(c62.539,39.315) 62.539,39.425 ; v1@62.641,39.494 cw(c62.539,39.534) 62.539,39.425 ; v1@62.81,39.234 ccw(c62.769,38.222) 62.052,38.938 ; v1(62.818,39.425) 62.539,39.425 ; 62.052,38.938 62.539,39.425
  Bottom Layer w0.152: R46.1@45.189,7.759 ccw(c44.701,8.28) v1(45.415,8.28) ; v1@45.272,8.175 cw(c45.034,8) 45.32,7.923 cw(c45.605,7.847) v1@45.486,8.118 ; v1@45.289,8.155 cw(c44.986,7.851) 45.415,7.851 cw(c45.844,7.851) v1@45.541,8.155 ; R46.1@45.294,7.648 ccw(c45.031,7.929) 45.415,7.929 ccw(c45.8,7.929) R46.1@45.537,7.648 ; v1@45.344,8.118 cw(c45.226,7.847) 45.511,7.923 cw(c45.796,8) v1@45.558,8.175 ; R46.1@45.415,7.518 v1(45.415,8.28) ; R46.1@45.641,7.759 cw(c46.129,8.28) v1(45.415,8.28)
RTC_DATA: R25.2 U3.M8 U11.6 | length 22.7
  Top Layer w0.127: v1@55.88,53.67 v1(55.905,53.696) U11.6@57.252,53.696 ; v1@56.04,53.561 cw(c56.365,53.236) 56.365,53.696 cw(c56.365,54.156) v1@56.04,53.83 ; U11.6@56.624,53.525 ccw(c56.212,53.113) 56.212,53.696 ccw(c56.212,54.278) U11.6@56.624,53.866
  Top Layer w0.254: v1@63.818,45.298 cw(c63.818,44.991) 64.035,45.208 cw(c64.252,45.425) v1@63.945,45.425 ; v1(63.818,45.425) U3.M8@64.318,44.925 ; U3.M8@64.195,44.925 ccw(c63.898,44.925) 64.108,45.135 ccw(c64.318,45.345) U3.M8@64.318,45.048
  Mid-Layer 1 w0.127: v1@55.905,53.505 cw(c55.905,53.045) 56.231,53.37 cw(c56.556,53.696) v1@56.096,53.696 ; v1(55.905,53.696) 56.413,53.188 56.413,51.689 61.214,46.888 63.043,46.888 63.348,46.584 63.348,45.895 v1(63.818,45.425) ; v1@63.627,45.425 ccw(c63.168,45.425) 63.493,45.75 ccw(c63.818,46.075) v1@63.818,45.615
  Bottom Layer w0.152: v1(55.905,53.696) R25.2@56.871,53.696 ; v1@55.994,53.85 ccw(c56.267,54.322) 56.409,53.795 ; v1@56.031,53.57 cw(c56.335,53.266) 56.335,53.696 cw(c56.335,54.125) v1@56.031,53.821 ; v1@56.038,53.696 ccw(c56.038,54.579) R25.2@56.663,53.954 ; v1@56.059,53.607 cw(c56.33,53.45) 56.249,53.752 ; 56.16,53.696 cw(c56.16,52.985) R25.2@56.663,53.488 ; 56.405,53.696 ccw(c56.405,54.212) R25.2@56.77,53.847
RTC_NRST: R26.2 U3.N8 U11.5 | length 20.9
  Top Layer w0.127: v1(55.905,52.426) U11.5@57.252,52.426 ; v1@56.04,52.291 cw(c56.365,51.966) 56.365,52.426 cw(c56.365,52.886) v1@56.04,52.56 ; U11.5@56.624,52.255 ccw(c56.212,51.843) 56.212,52.426 ccw(c56.212,53.008) U11.5@56.624,52.596
  Top Layer w0.254: v1@62.818,45.298 cw(c62.818,44.991) 63.035,45.208 cw(c63.252,45.425) v1@62.945,45.425 ; v1(62.818,45.425) U3.N8@63.318,44.925 ; U3.N8@63.195,44.925 ccw(c62.898,44.925) 63.108,45.135 ccw(c63.318,45.345) U3.N8@63.318,45.048
  Mid-Layer 1 w0.127: v1@55.771,52.291 cw(c55.445,51.966) 55.905,51.966 cw(c56.365,51.966) v1@56.04,52.291 ; v1(55.905,52.426) 55.905,51.537 61.544,45.898 62.345,45.898 v1(62.818,45.425) ; v1@62.627,45.425 ccw(c62.168,45.425) 62.493,45.75 ccw(c62.818,46.075) v1@62.818,45.615
  Bottom Layer w0.152: v1@55.995,52.272 cw(c56.209,51.903) 56.319,52.315 cw(c56.429,52.727) v1@56.06,52.514 ; v1@56.031,52.3 cw(c56.335,51.996) 56.335,52.426 cw(c56.335,52.855) v1@56.031,52.551 ; 56.176,52.426 cw(c56.176,51.762) R26.2@56.744,52.105 ; 56.446,52.426 cw(c56.446,51.925) R26.2@56.874,52.184 ; R26.2@56.613,52.026 ccw(c55.905,51.598) v1(55.905,52.426) 56.667,52.426 R26.2@56.896,52.197
RTC_SCLK: R27.2 U3.P6 U11.7 | length 20.6
  Top Layer w0.127: v1(55.931,54.966) U11.7@57.252,54.966 ; v1@56.066,54.831 cw(c56.391,54.506) 56.391,54.966 cw(c56.391,55.426) v1@56.066,55.1 ; U11.7@56.624,54.795 ccw(c56.212,54.383) 56.212,54.966 ccw(c56.212,55.548) U11.7@56.624,55.136
  Top Layer w0.254: v1@61.818,47.298 cw(c61.818,46.991) 62.035,47.208 cw(c62.252,47.425) v1@61.945,47.425 ; v1(61.818,47.425) U3.P6@62.318,46.925 ; U3.P6@62.195,46.925 ccw(c61.898,46.925) 62.108,47.135 ccw(c62.318,47.345) U3.P6@62.318,47.048
  Mid-Layer 1 w0.127: v1@55.931,54.775 cw(c55.931,54.315) 56.256,54.64 cw(c56.581,54.966) v1@56.121,54.966 ; v1(55.931,54.966) 56.82,54.077 56.82,52.045 61.44,47.425 ; v1@61.665,47.311 ccw(c61.44,47.144) 61.44,47.425 ; v1@61.665,47.538 cw(c61.44,47.705) 61.44,47.425 ; v1(61.818,47.425) 61.44,47.425
  Bottom Layer w0.152: v1@56.032,55.111 ccw(c56.217,55.376) 56.3,55.065 ccw(c56.384,54.753) v1@56.092,54.89 ; v1@56.048,55.099 ccw(c56.286,55.369) 56.38,55.021 ; v1@56.057,54.84 cw(c56.36,54.536) 56.36,54.966 cw(c56.36,55.395) v1@56.057,55.091 ; v1@56.085,54.877 cw(c56.272,54.769) 56.216,54.977 ; v1@56.172,54.966 ccw(c56.172,55.589) R27.2@56.735,55.321 ; 56.413,54.966 ccw(c56.413,55.475) R27.2@56.873,55.256 ; R27.2@56.598,55.387 cw(c55.931,55.704) v1(55.931,54.966) R27.2@56.617,54.966
RXD: R7.1 U3.M2 U4.26 | length 69.4
  Top Layer w0.127: U4.26@20.046,69.226 23.764,69.226 32.512,60.477 58.318,60.477 63.83,54.966 63.83,51.412 U3.M2@64.318,50.925 ; U4.26@20.562,69.175 cw(c20.684,69.053) 20.684,69.226 cw(c20.684,69.398) U4.26@20.562,69.276 ; 24.142,68.848 ccw(c24.788,69.494) R7.1@25.188,68.673 ; 24.267,68.722 ccw(c24.87,69.325) R7.1@25.244,68.559 ; 24.393,68.596 ccw(c24.953,69.155) R7.1@25.299,68.444 ; 24.519,68.47 ccw(c25.035,68.986) R7.1@25.355,68.33 ; R7.1@24.879,68.707 ccw(c26.32,68.707) 25.301,67.688 ; R7.1@25.006,68.707 ccw(c26.754,68.707) 25.518,67.471 ; R7.1@25.133,68.707 ccw(c27.188,68.707) 25.735,67.254 ; R7.1@25.26,68.707 ccw(c27.621,68.707) 25.952,67.038 ; R7.1@25.387,68.707 ccw(c28.055,68.707) 26.169,66.821 ; R7.1@25.514,68.707 ccw(c28.488,68.707) 26.385,66.604 ; U3.M2@64.131,50.925 ccw(c63.681,50.925) 64,51.243 ccw(c64.318,51.561) U3.M2@64.318,51.111
S_A0: U3.F11 U9.23 | length 39.5
  Top Layer w0.127: v1@82.108,12.385 cw(c81.783,12.06) 82.243,12.06 cw(c82.703,12.06) v1@82.378,12.385 ; U9.23@82.135,11.944 ccw(c81.875,12.204) 82.243,12.204 ccw(c82.611,12.204) U9.23@82.351,11.944 ; U9.23@82.243,11.1 v1(82.243,12.52)
  Top Layer w0.254: U3.F11@70.318,41.802 cw(c70.318,41.505) 70.528,41.715 cw(c70.738,41.925) U3.F11@70.441,41.925 ; U3.F11@70.318,41.925 v1(70.818,41.425) ; v1@70.691,41.425 ccw(c70.384,41.425) 70.601,41.641 ccw(c70.818,41.858) v1@70.818,41.552
  Mid-Layer 1 w0.127: v1@70.818,41.234 cw(c70.818,40.774) 71.143,41.099 cw(c71.468,41.425) v1@71.009,41.425 ; v1(70.818,41.425) 71.323,40.919 71.323,36.17 81.661,25.832 81.661,13.102 v1(82.243,12.52) ; v1@82.053,12.52 ccw(c81.593,12.52) 81.918,12.845 ccw(c82.243,13.17) v1@82.243,12.711
S_A1: U3.E11 U9.24 | length 39.4
  Top Layer w0.127: v1@82.908,13.81 cw(c82.583,13.485) 83.043,13.485 cw(c83.503,13.485) v1@83.178,13.81 ; U9.24@82.935,11.944 ccw(c82.675,12.204) 83.043,12.204 ccw(c83.411,12.204) U9.24@83.151,11.944 ; U9.24@83.043,11.1 v1(83.043,13.945)
  Top Layer w0.254: U3.E11@71.318,41.802 cw(c71.318,41.505) 71.528,41.715 cw(c71.738,41.925) U3.E11@71.441,41.925 ; U3.E11@71.318,41.925 v1(71.818,41.425) ; v1@71.691,41.425 ccw(c71.384,41.425) 71.601,41.641 ccw(c71.818,41.858) v1@71.818,41.552
  Mid-Layer 1 w0.127: v1@71.709,41.268 cw(c71.564,41.06) 71.818,41.06 ; v1(71.818,41.425) 71.818,41.06 ; v1@71.927,41.268 ccw(c72.072,41.06) 71.818,41.06 ; v1@82.908,14.079 ccw(c82.583,14.405) 83.043,14.405 ccw(c83.503,14.405) v1@83.178,14.079 ; v1(83.043,13.945) 83.043,24.74 cw(c83.17,24.74) 83.17,24.867 ccw(c83.17,24.994) 83.297,24.994 ccw(c83.17,24.994) 83.17,25.121 cw(c83.17,25.248) 83.043,25.248 83.043,27.041 72.365,37.719 72.365,40.513 71.818,41.06
S_A2: U3.D14 U9.25 | length 39.6
  Top Layer w0.127: v1@83.708,13.073 cw(c83.383,12.748) 83.843,12.748 cw(c84.303,12.748) v1@83.978,13.073 ; U9.25@83.735,11.944 ccw(c83.475,12.204) 83.843,12.204 ccw(c84.211,12.204) U9.25@83.951,11.944 ; U9.25@83.843,11.1 v1(83.843,13.208)
  Top Layer w0.254: U3.D14@72.318,38.802 cw(c72.318,38.505) 72.528,38.715 cw(c72.738,38.925) U3.D14@72.441,38.925 ; U3.D14@72.318,38.925 v1(72.818,38.425) ; v1@72.691,38.425 ccw(c72.384,38.425) 72.601,38.641 ccw(c72.818,38.858) v1@72.818,38.552
  Mid-Layer 1 w0.127: v1@72.687,38.287 cw(c72.395,37.98) 72.818,37.98 ; v1(72.818,38.425) 72.818,37.98 ; v1@72.949,38.287 ccw(c73.241,37.98) 72.818,37.98 ; v1@83.708,13.343 ccw(c83.383,13.668) 83.843,13.668 ccw(c84.303,13.668) v1@83.978,13.343 ; v1(83.843,13.208) 83.843,20.091 ccw(c83.716,20.091) 83.716,20.218 83.48,20.218 cw(c83.48,20.345) 83.353,20.345 cw(c83.48,20.345) 83.48,20.472 84.206,20.472 ccw(c84.206,20.599) 84.333,20.599 ccw(c84.206,20.599) 84.206,20.726 83.48,20.726 cw(c83.48,20.853) 83.353,20.853 cw(c83.48,20.853) 83.48,20.98 84.206,20.98 ccw(c84.206,21.107) 84.333,21.107 ccw(c84.206,21.107) 84.206,21.234 83.97,21.234 cw(c83.97,21.361) 83.843,21.361 83.843,26.955 72.818,37.98
S_A3: U3.C14 U9.26 | length 39.7
  Top Layer w0.127: v1@84.508,12.362 cw(c84.183,12.037) 84.643,12.037 cw(c85.103,12.037) v1@84.778,12.362 ; U9.26@84.535,11.944 ccw(c84.275,12.204) 84.643,12.204 ccw(c85.011,12.204) U9.26@84.751,11.944 ; U9.26@84.643,11.1 v1(84.643,12.497)
  Top Layer w0.254: U3.C14@73.318,38.802 cw(c73.318,38.505) 73.528,38.715 cw(c73.738,38.925) U3.C14@73.441,38.925 ; U3.C14@73.318,38.925 v1(73.818,38.425) ; v1@73.691,38.425 ccw(c73.384,38.425) 73.601,38.641 ccw(c73.818,38.858) v1@73.818,38.552
  Mid-Layer 1 w0.127: v1@73.683,38.29 cw(c73.358,37.965) 73.818,37.965 cw(c74.278,37.965) v1@73.953,38.29 ; v1(73.818,38.425) 73.818,37.713 84.643,26.888 84.643,23.216 ccw(c84.77,23.216) 84.77,23.089 85.016,23.089 cw(c85.016,22.962) 85.143,22.962 cw(c85.016,22.962) 85.016,22.835 84.27,22.835 ccw(c84.27,22.708) 84.143,22.708 ccw(c84.27,22.708) 84.27,22.581 85.016,22.581 cw(c85.016,22.454) 85.143,22.454 cw(c85.016,22.454) 85.016,22.327 84.27,22.327 ccw(c84.27,22.2) 84.143,22.2 ccw(c84.27,22.2) 84.27,22.073 84.516,22.073 cw(c84.516,21.946) 84.643,21.946 v1(84.643,12.497) ; v1@84.508,12.632 ccw(c84.183,12.957) 84.643,12.957 ccw(c85.103,12.957) v1@84.778,12.632
S_A4: U3.A14 U9.29 | length 37
  Top Layer w0.127: U3.A14@75.318,38.925 76.341,38.925 84.643,30.622 84.643,28.88 cw(c84.516,28.88) 84.516,28.753 84.276,28.753 ccw(c84.276,28.626) 84.149,28.626 ccw(c84.276,28.626) 84.276,28.499 85.01,28.499 cw(c85.01,28.372) 85.137,28.372 cw(c85.01,28.372) 85.01,28.245 84.276,28.245 ccw(c84.276,28.118) 84.149,28.118 ccw(c84.276,28.118) 84.276,27.991 85.01,27.991 cw(c85.01,27.864) 85.137,27.864 cw(c85.01,27.864) 85.01,27.737 84.276,27.737 ccw(c84.276,27.61) 84.149,27.61 ccw(c84.276,27.61) 84.276,27.483 85.01,27.483 cw(c85.01,27.356) 85.137,27.356 cw(c85.01,27.356) 85.01,27.229 84.276,27.229 ccw(c84.276,27.102) 84.149,27.102 ccw(c84.276,27.102) 84.276,26.975 85.01,26.975 cw(c85.01,26.848) 85.137,26.848 cw(c85.01,26.848) 85.01,26.721 84.276,26.721 ccw(c84.276,26.594) 84.149,26.594 ccw(c84.276,26.594) 84.276,26.467 85.01,26.467 cw(c85.01,26.34) 85.137,26.34 cw(c85.01,26.34) 85.01,26.213 84.276,26.213 ccw(c84.276,26.086) 84.149,26.086 ccw(c84.276,26.086) 84.276,25.959 85.01,25.959 cw(c85.01,25.832) 85.137,25.832 cw(c85.01,25.832) 85.01,25.705 84.276,25.705 ccw(c84.276,25.578) 84.149,25.578 ccw(c84.276,25.578) 84.276,25.451 85.01,25.451 cw(c85.01,25.324) 85.137,25.324 cw(c85.01,25.324) 85.01,25.197 84.276,25.197 ccw(c84.276,25.07) 84.149,25.07 ccw(c84.276,25.07) 84.276,24.943 84.898,24.943 cw(c84.898,24.816) 85.025,24.816 cw(c84.898,24.816) 84.898,24.689 84.276,24.689 ccw(c84.276,24.562) 84.149,24.562 ccw(c84.276,24.562) 84.276,24.435 84.516,24.435 cw(c84.516,24.308) 84.643,24.308 cw(c84.516,24.308) 84.516,24.181 84.276,24.181 ccw(c84.276,24.054) 84.149,24.054 ccw(c84.276,24.054) 84.276,23.927 84.516,23.927 cw(c84.516,23.8) 84.643,23.8 ; U3.A14@75.45,38.793 cw(c75.768,38.474) 75.768,38.925 cw(c75.768,39.375) U3.A14@75.45,39.056 ; U9.29@84.56,23.649 ccw(c84.463,23.8) 84.643,23.8 ; U9.29@84.643,22.784 84.643,23.8 ; U9.29@84.726,23.649 cw(c84.823,23.8) 84.643,23.8
S_A5: U3.A15 U9.30 | length 37.3
  Top Layer w0.127: U3.A15@75.318,37.925 76.68,37.925 77.065,37.539 cw(c76.976,37.45) 77.065,37.36 76.894,37.188 ccw(c76.984,37.098) 76.894,37.009 ccw(c76.984,37.098) 77.073,37.009 77.245,37.18 cw(c77.335,37.09) 77.425,37.18 cw(c77.335,37.09) 77.425,37.001 77.253,36.829 ccw(c77.343,36.739) 77.253,36.649 ccw(c77.343,36.739) 77.433,36.649 77.604,36.821 cw(c77.694,36.731) 77.784,36.821 cw(c77.694,36.731) 77.784,36.641 77.612,36.47 ccw(c77.702,36.38) 77.612,36.29 ccw(c77.702,36.38) 77.792,36.29 77.963,36.462 cw(c78.053,36.372) 78.143,36.462 cw(c78.053,36.372) 78.143,36.282 77.971,36.111 ccw(c78.061,36.021) 77.971,35.931 ccw(c78.061,36.021) 78.151,35.931 78.323,36.103 cw(c78.412,36.013) 78.502,36.103 cw(c78.412,36.013) 78.502,35.923 78.331,35.751 ccw(c78.42,35.662) 78.331,35.572 ccw(c78.42,35.662) 78.51,35.572 78.682,35.743 cw(c78.772,35.654) 78.861,35.743 cw(c78.772,35.654) 78.861,35.564 78.69,35.392 ccw(c78.78,35.302) 78.69,35.213 ccw(c78.78,35.302) 78.869,35.213 79.041,35.384 cw(c79.131,35.294) 79.221,35.384 cw(c79.131,35.294) 79.221,35.205 79.049,35.033 ccw(c79.139,34.943) 79.049,34.853 ccw(c79.139,34.943) 79.229,34.853 79.4,35.025 cw(c79.49,34.935) 79.58,35.025 cw(c79.49,34.935) 79.58,34.845 79.408,34.674 ccw(c79.498,34.584) 79.408,34.494 ccw(c79.498,34.584) 79.588,34.494 79.759,34.666 cw(c79.849,34.576) 79.939,34.666 cw(c79.849,34.576) 79.939,34.486 79.767,34.314 ccw(c79.857,34.225) 79.767,34.135 ccw(c79.857,34.225) 79.947,34.135 80.119,34.307 cw(c80.208,34.217) 80.298,34.307 cw(c80.208,34.217) 80.298,34.127 80.127,33.955 ccw(c80.216,33.865) 80.127,33.776 ccw(c80.216,33.865) 80.306,33.776 80.478,33.947 cw(c80.568,33.857) 80.658,33.947 cw(c80.568,33.857) 80.658,33.768 80.486,33.596 ccw(c80.576,33.506) 80.486,33.416 ccw(c80.576,33.506) 80.665,33.416 80.837,33.588 cw(c80.927,33.498) 81.017,33.588 cw(c80.927,33.498) 81.017,33.408 80.845,33.237 ccw(c80.935,33.147) 80.845,33.057 ccw(c80.935,33.147) 81.025,33.057 81.196,33.229 cw(c81.286,33.139) 81.376,33.229 cw(c81.286,33.139) 81.376,33.049 81.204,32.878 ccw(c81.294,32.788) 81.204,32.698 ccw(c81.294,32.788) 81.384,32.698 81.556,32.87 cw(c81.645,32.78) 81.735,32.87 cw(c81.645,32.78) 81.735,32.69 81.564,32.518 ccw(c81.653,32.429) 81.564,32.339 ccw(c81.653,32.429) 81.743,32.339 81.915,32.51 cw(c82.005,32.421) 82.094,32.51 cw(c82.005,32.421) 82.094,32.331 81.923,32.159 ccw(c82.013,32.069) 81.923,31.98 ccw(c82.013,32.069) 82.102,31.98 82.274,32.151 cw(c82.364,32.061) 82.454,32.151 cw(c82.364,32.061) 82.454,31.972 82.282,31.8 ccw(c82.372,31.71) 82.282,31.62 ccw(c82.372,31.71) 82.462,31.62 82.633,31.792 cw(c82.723,31.702) 82.813,31.792 cw(c82.723,31.702) 82.813,31.612 82.641,31.441 ccw(c82.731,31.351) 82.641,31.261 ccw(c82.731,31.351) 82.821,31.261 82.992,31.433 cw(c83.082,31.343) 83.172,31.433 cw(c83.082,31.343) 83.172,31.253 83,31.082 ccw(c83.09,30.992) 83,30.902 ccw(c83.09,30.992) 83.18,30.902 83.352,31.074 cw(c83.441,30.984) 83.531,31.074 83.843,30.762 83.843,30.508 cw(c83.716,30.508) 83.716,30.381 83.473,30.381 ccw(c83.473,30.254) 83.346,30.254 ccw(c83.473,30.254) 83.473,30.127 84.213,30.127 cw(c84.213,30) 84.34,30 cw(c84.213,30) 84.213,29.873 83.473,29.873 ccw(c83.473,29.746) 83.346,29.746 ccw(c83.473,29.746) 83.473,29.619 83.716,29.619 cw(c83.716,29.492) 83.843,29.492 U9.30@83.843,22.784 ; U3.A15@75.45,37.793 cw(c75.768,37.474) 75.768,37.925 cw(c75.768,38.375) U3.A15@75.45,38.056 ; U9.30@83.735,23.628 ccw(c83.475,23.888) 83.843,23.888 ccw(c84.211,23.888) U9.30@83.951,23.628
S_A6: U3.B16 U9.31 | length 37
  Top Layer w0.127: U3.B16@74.318,36.738 cw(c74.318,36.288) 74.636,36.606 cw(c74.955,36.925) U3.B16@74.504,36.925 ; U3.B16@74.318,36.925 75.378,35.865 77.673,35.865 83.043,30.495 83.043,28.88 cw(c82.916,28.88) 82.916,28.753 82.669,28.753 ccw(c82.669,28.626) 82.542,28.626 ccw(c82.669,28.626) 82.669,28.499 83.417,28.499 cw(c83.417,28.372) 83.544,28.372 cw(c83.417,28.372) 83.417,28.245 82.669,28.245 ccw(c82.669,28.118) 82.542,28.118 ccw(c82.669,28.118) 82.669,27.991 83.417,27.991 cw(c83.417,27.864) 83.544,27.864 cw(c83.417,27.864) 83.417,27.737 82.669,27.737 ccw(c82.669,27.61) 82.542,27.61 ccw(c82.669,27.61) 82.669,27.483 83.417,27.483 cw(c83.417,27.356) 83.544,27.356 cw(c83.417,27.356) 83.417,27.229 82.669,27.229 ccw(c82.669,27.102) 82.542,27.102 ccw(c82.669,27.102) 82.669,26.975 83.417,26.975 cw(c83.417,26.848) 83.544,26.848 cw(c83.417,26.848) 83.417,26.721 82.669,26.721 ccw(c82.669,26.594) 82.542,26.594 ccw(c82.669,26.594) 82.669,26.467 83.417,26.467 cw(c83.417,26.34) 83.544,26.34 cw(c83.417,26.34) 83.417,26.213 82.669,26.213 ccw(c82.669,26.086) 82.542,26.086 ccw(c82.669,26.086) 82.669,25.959 83.417,25.959 cw(c83.417,25.832) 83.544,25.832 cw(c83.417,25.832) 83.417,25.705 82.669,25.705 ccw(c82.669,25.578) 82.542,25.578 ccw(c82.669,25.578) 82.669,25.451 83.417,25.451 cw(c83.417,25.324) 83.544,25.324 cw(c83.417,25.324) 83.417,25.197 82.669,25.197 ccw(c82.669,25.07) 82.542,25.07 ccw(c82.669,25.07) 82.669,24.943 83.417,24.943 cw(c83.417,24.816) 83.544,24.816 cw(c83.417,24.816) 83.417,24.689 82.669,24.689 ccw(c82.669,24.562) 82.542,24.562 ccw(c82.669,24.562) 82.669,24.435 83.417,24.435 cw(c83.417,24.308) 83.544,24.308 cw(c83.417,24.308) 83.417,24.181 82.669,24.181 ccw(c82.669,24.054) 82.542,24.054 ccw(c82.669,24.054) 82.669,23.927 82.916,23.927 cw(c82.916,23.8) 83.043,23.8 ; U9.31@82.96,23.649 ccw(c82.863,23.8) 83.043,23.8 ; U9.31@83.043,22.784 83.043,23.8 ; U9.31@83.126,23.649 cw(c83.223,23.8) 83.043,23.8